# Altium PCB MIC29302 (2).PcbDoc
Units mm, origin at the board's own origin, x right, y up, seen from the top; angles counter-clockwise.
Board outline 152.4 x 101.6 mm, 2 copper layers (Top Layer, Bottom Layer), stack 0.325 mm thick; 78 components, 35 nets, 306 pads, 37 vias.
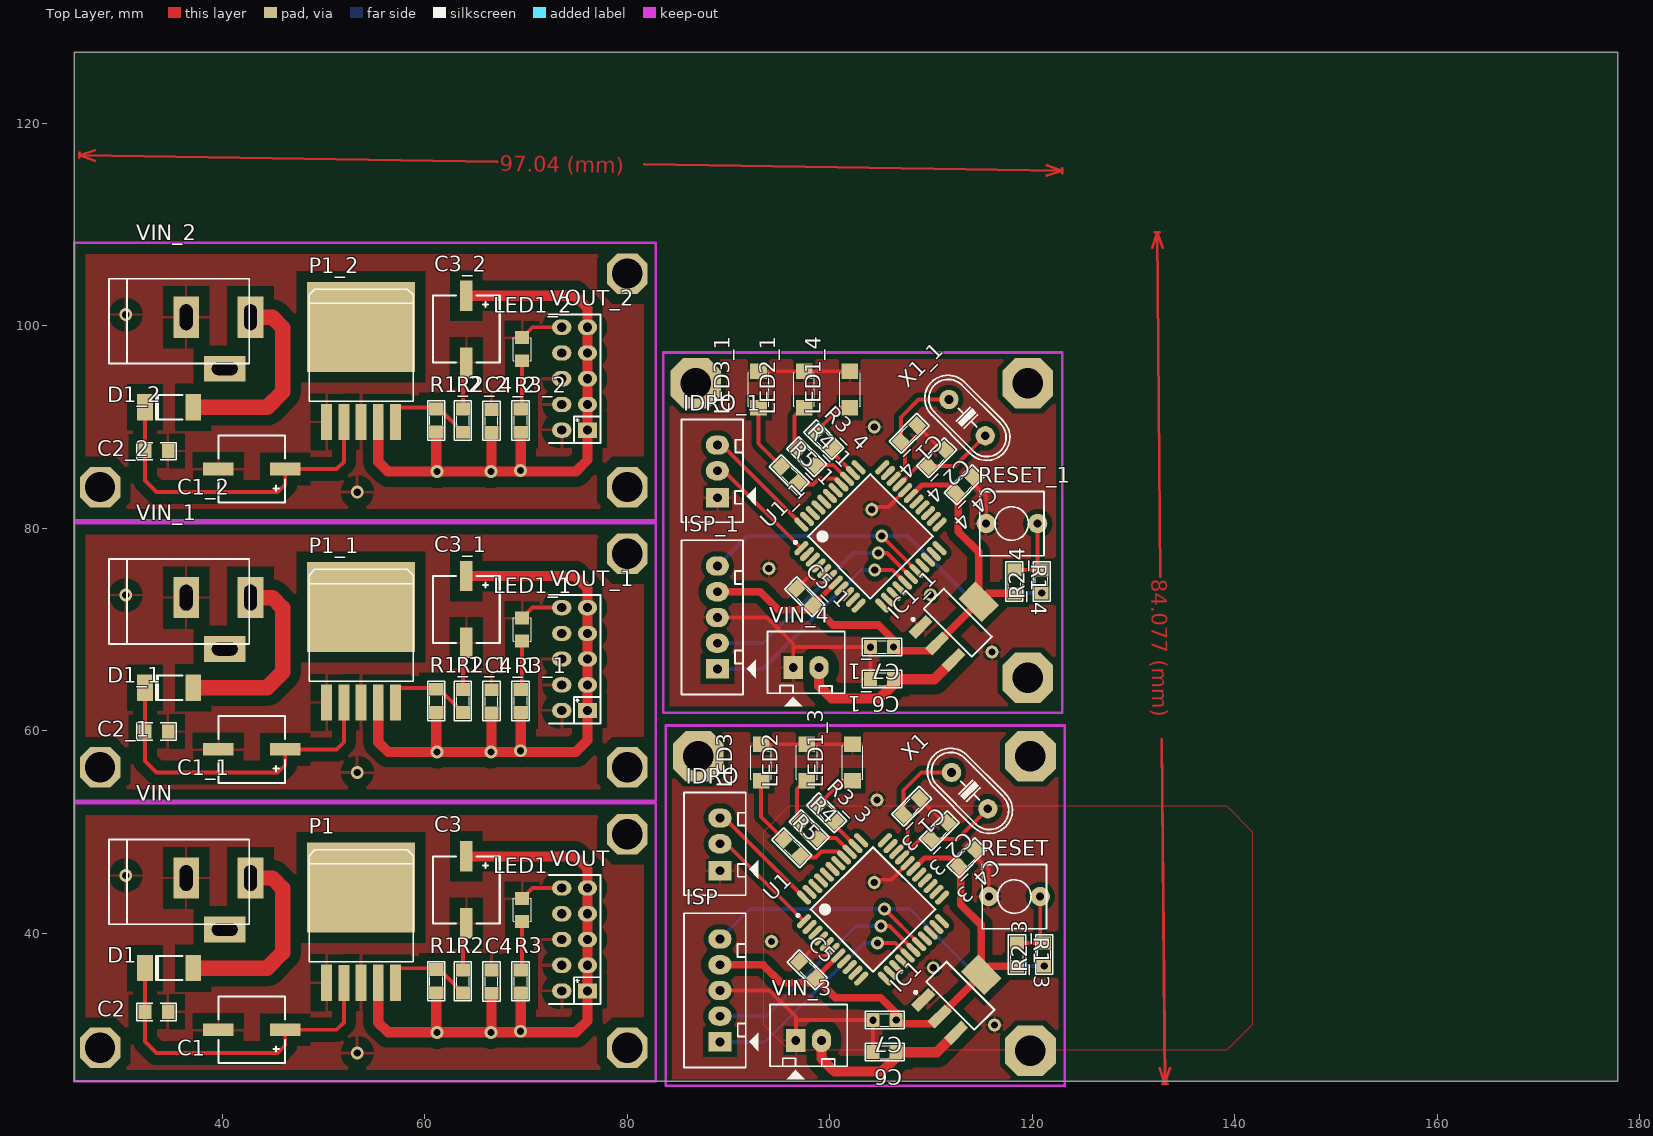
[diagram p0: Top Layer view]
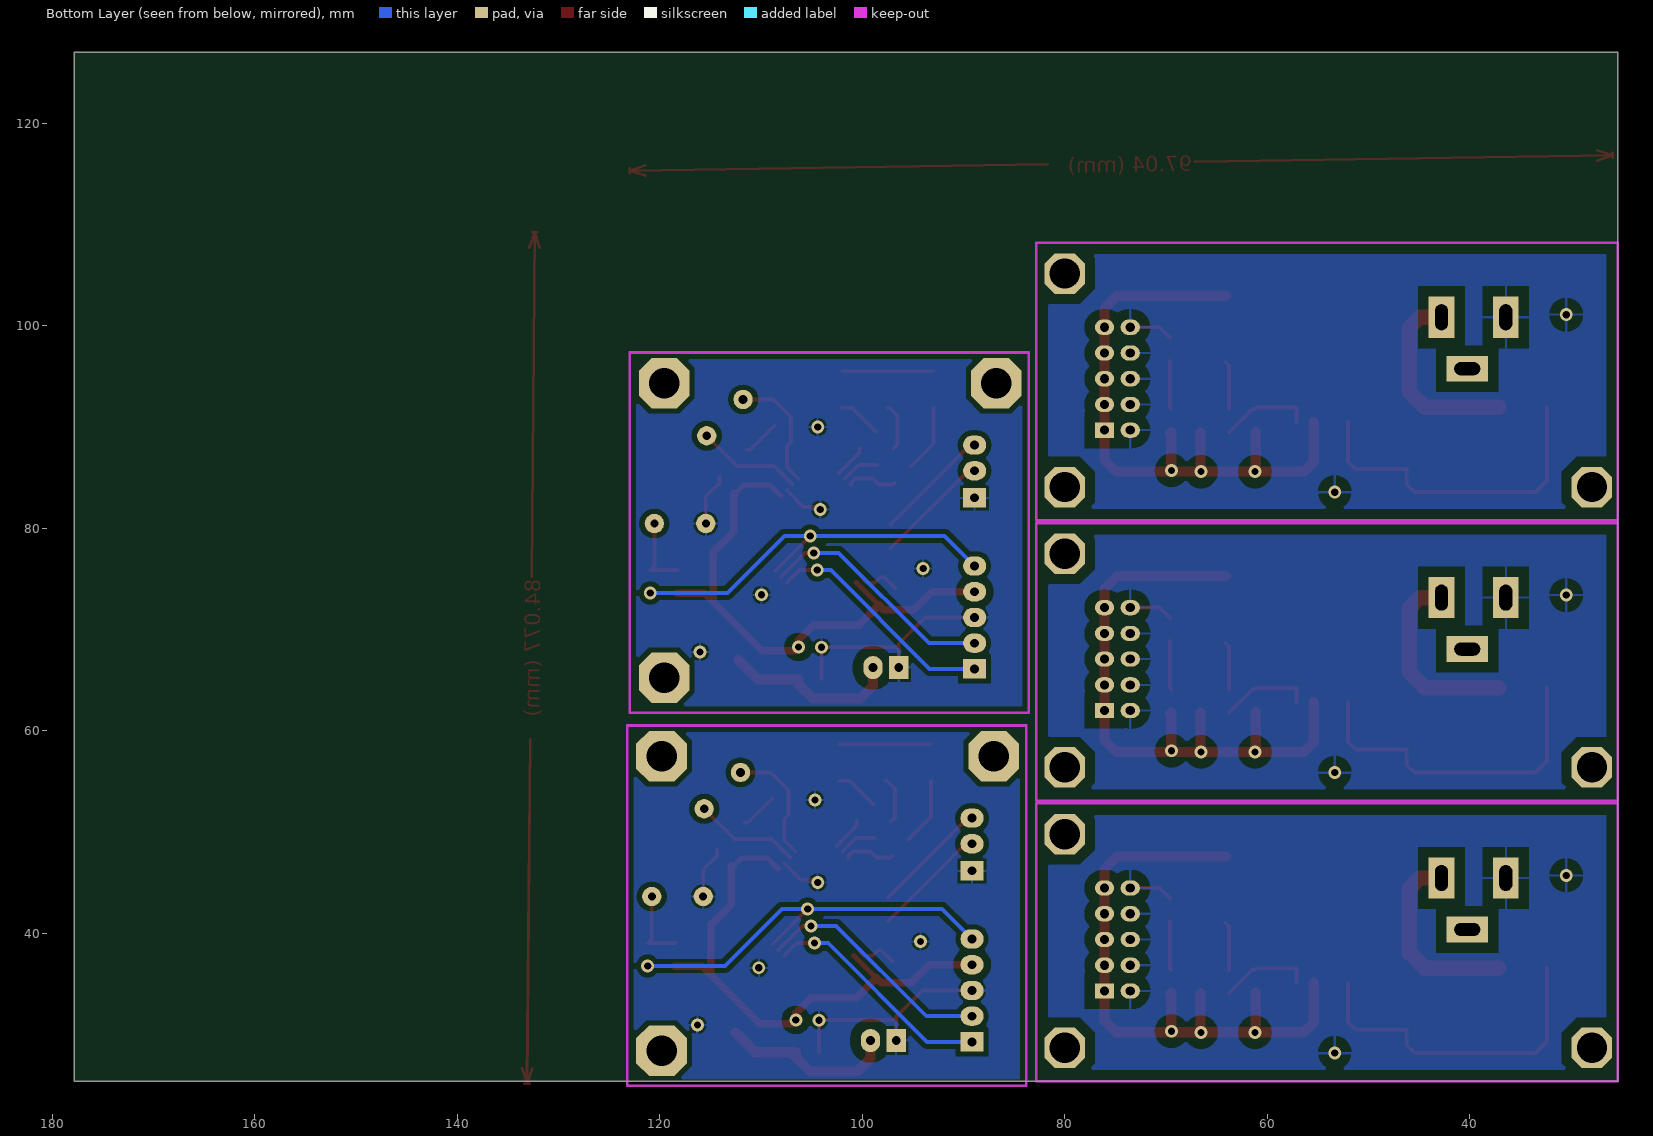
[diagram p1: Bottom Layer view, seen from below]
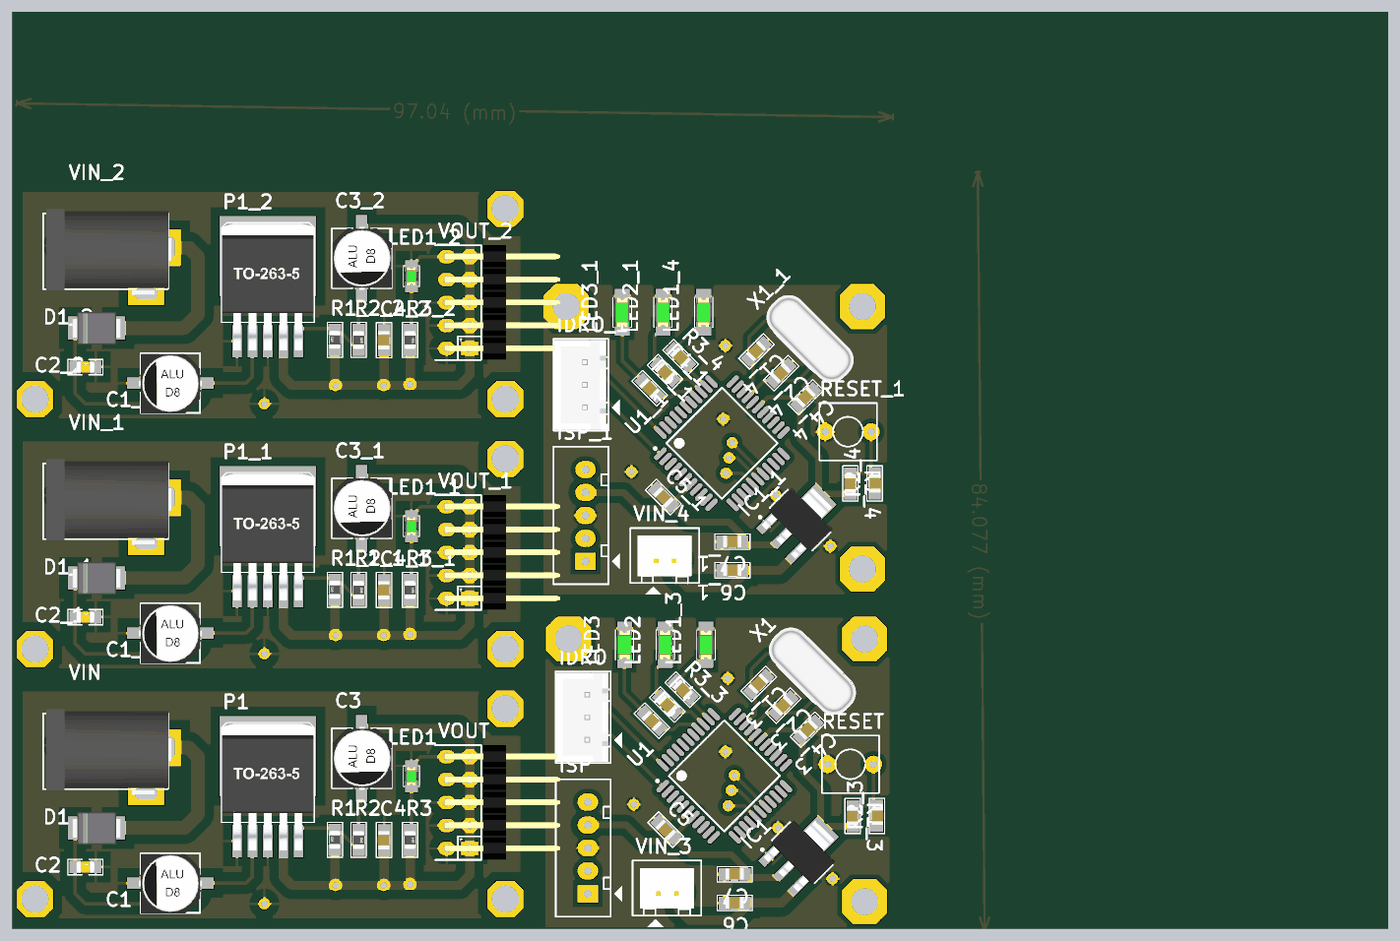
[diagram p2: 3D render of the assembled board from above, using the file's embedded part models]

## Layer stack, top to bottom
Top Layer: signal copper 0.0356
Dielectric: core 0.254, FR-4, Dk 4.2
Bottom Layer: signal copper 0.0356

## Board outline
25.4,25.4 177.8,25.4 177.8,127 25.4,127

## Design rules (kind name [scope] priority, off if disabled: settings)
Clearance CIN [All] p1: gap=1.016
Clearance COUT [InNet('OUT')] p2: gap=0.762
Clearance [All] p3: gap=0.508
PolygonConnect [All] p1: connectstyle=Relief reliefconductorwidth=0.254 reliefentries=4 polygonreliefangle="90 Angle"
RoutingVias [All] p1: holewidth=0.711 width=1.27 viastyle="Through Hole" minholewidth=0.711 minwidth=1.27 maxholewidth=0.711 maxwidth=1.27
SilkscreenOverComponentPads SilkToSolderMaskClearance [IsPad] p1: minsilkscreentomaskgap=0.254
SolderMaskExpansion [All] p1: expansion=0.102
Width OUT [InNet('OUT')] p1: maxlimit=1.016 minlimit=1.016 preferedwidth=1.016
Width IN [InNet('IN')] p2: maxlimit=1.524 minlimit=1.524 preferedwidth=1.524
Width [All] p3: maxlimit=0.381 minlimit=0.381 preferedwidth=0.381
27 further rules are at their usual default settings.

## Components (designator, comment, footprint, x,y, rotation, side; value= is the part's Value field where it differs from the comment)
C1 "100uF/450V" CAP-D8-220uF/16V 42.926,30.48 r180 top
C1_1 "100uF/450V" CAP-D8-220uF/16V 42.926,58.166 r180 top (schematic designator C1)
C1_2 "100uF/450V" CAP-D8-220uF/16V 42.926,85.852 r180 top (schematic designator C1)
C1_3 "22pF" SM-0805 108.077,52.527 r225 top (schematic designator C1)
C1_4 "22pF" SM-0805 107.823,89.357 r225 top (schematic designator C1)
C2 "1uF/450V" CAP0805 33.528,32.258 r0 top
C2_1 "1uF/450V" CAP0805 33.528,59.944 r0 top (schematic designator C2)
C2_2 "1uF/450V" CAP0805 33.528,87.63 r0 top (schematic designator C2)
C2_3 "2pF" SM-0805 110.807,50.114 r225 top (schematic designator C2)
C2_4 "2pF" SM-0805 110.553,86.944 r225 top (schematic designator C2)
C3 "220uF/450V" CAP-D8-220uF/16V 64.11,44.298 r270 top
C3_1 "220uF/450V" CAP-D8-220uF/16V 64.11,71.984 r270 top (schematic designator C3)
C3_2 "220uF/450V" CAP-D8-220uF/16V 64.11,99.67 r270 top (schematic designator C3)
C4 "103" SM-0805 66.599,35.23 r270 top
C4_1 "103" SM-0805 66.599,62.916 r270 top (schematic designator C4)
C4_2 "103" SM-0805 66.599,90.602 r270 top (schematic designator C4)
C4_3 "103" SM-0805 113.538,47.447 r225 top (schematic designator C4)
C4_4 "103" SM-0805 113.284,84.277 r225 top (schematic designator C4)
C5 "103" SM-0805 97.79,36.398 r315 top
C5_1 "103" SM-0805 97.536,73.228 r315 top (schematic designator C5)
C6 "1uF/450V" SM-0805 105.41,28.27 r180 top
C6_1 "1uF/450V" SM-0805 105.156,65.1 r180 top (schematic designator C6)
C7 "1uF/450V" SM-0805 105.41,31.445 r180 top
C7_1 "1uF/450V" SM-0805 105.156,68.275 r180 top (schematic designator C7)
D1 "1N5822" DIODE-M7 34.76,36.576 r180 top
D1_1 "1N5822" DIODE-M7 34.76,64.262 r180 top (schematic designator D1)
D1_2 "1N5822" DIODE-M7 34.76,91.948 r180 top (schematic designator D1)
IC1 "LM1117" SOT223-4N 112.903,33.858 r45 top
IC1_1 "LM1117" SOT223-4N 112.649,70.688 r45 top (schematic designator IC1)
IDRO "JP3" CON3 89.154,46.304 r90 top
IDRO_1 "JP3" CON3 88.9,83.134 r90 top (schematic designator IDRO)
ISP "JP5" CON5 89.154,29.286 r90 top
ISP_1 "JP5" CON5 88.9,66.116 r90 top (schematic designator ISP)
LED1 "LED" LED0805-Green 69.621,41.173 r90 top
LED1_1 "LED" LED0805-Green 69.621,68.859 r90 top (schematic designator LED1)
LED1_2 "LED" LED0805-Green 69.621,96.545 r90 top (schematic designator LED1)
LED1_3 "LED" LED1206-Green 102.235,55.067 r90 top (schematic designator LED1)
LED1_4 "LED" LED1206-Green 101.981,91.897 r90 top (schematic designator LED1)
LED2 "LED" LED1206-Green 97.727,55.067 r90 top
LED2_1 "LED" LED1206-Green 97.472,91.897 r90 top (schematic designator LED2)
LED3 "LED" LED1206-Green 93.218,55.067 r90 top
LED3_1 "LED" LED1206-Green 92.964,91.897 r90 top (schematic designator LED3)
P1 "MIC29302" LM2576_TO-263 53.721,42.723 r0 top
P1_1 "MIC29302" LM2576_TO-263 53.721,70.409 r0 top (schematic designator P1)
P1_2 "MIC29302" LM2576_TO-263 53.721,98.095 r0 top (schematic designator P1)
R1 "100k" RES0805 61.138,34.138 r90 top
R1_1 "100k" RES0805 61.138,61.824 r90 top (schematic designator R1)
R1_2 "100k" RES0805 61.138,89.51 r90 top (schematic designator R1)
R1_3 "4.7k" SM-0805 118.491,37.897 r270 top (schematic designator R1)
R1_4 "4.7k" SM-0805 118.237,74.727 r270 top (schematic designator R1)
R2 "43k" RES0805 63.779,36.398 r270 top
R2_1 "43k" RES0805 63.779,64.084 r270 top (schematic designator R2)
R2_2 "43k" RES0805 63.779,91.77 r270 top (schematic designator R2)
R2_3 "330" SM-0805 121.158,37.922 r90 top (schematic designator R2)
R2_4 "330" SM-0805 120.904,74.752 r90 top (schematic designator R2)
R3 "470" RES0805 69.482,36.398 r270 top
R3_1 "470" RES0805 69.482,64.084 r270 top (schematic designator R3)
R3_2 "470" RES0805 69.482,91.77 r270 top (schematic designator R3)
R3_3 "220" SM-0805 99.695,51.892 r315 top (schematic designator R3)
R3_4 "220" SM-0805 99.441,88.722 r315 top (schematic designator R3)
R4 "220" SM-0805 97.98,50.241 r315 top
R4_1 "220" SM-0805 97.727,87.071 r315 top (schematic designator R4)
R5 "220" SM-0805 96.266,48.463 r315 top
R5_1 "220" SM-0805 96.012,85.293 r315 top (schematic designator R5)
RESET "SW" SW2 115.697,43.637 r0 top
RESET_1 "SW" SW2 115.443,80.467 r0 top (schematic designator RESET)
U1 "PIC18F46K20-I/PT" TQFP-PT44_N 104.267,42.367 r45 top
U1_1 "PIC18F46K20-I/PT" TQFP-PT44_N 104.013,79.197 r45 top (schematic designator U1)
VIN "JP2" DC-IN 39.624,42.926 r0 top
VIN_1 "JP2" DC-IN 39.624,70.612 r0 top (schematic designator VIN)
VIN_2 "JP2" DC-IN 39.624,98.298 r0 top (schematic designator VIN)
VIN_3 "JP2" CON2 96.647,29.413 r0 top (schematic designator VIN)
VIN_4 "JP2" CON2 96.393,66.243 r0 top (schematic designator VIN)
VOUT "Header 5x2" HED2X5_cen 76.073,34.315 r90 top
VOUT_1 "Header 5x2" HED2X5_cen 76.073,62.001 r90 top (schematic designator VOUT)
VOUT_2 "Header 5x2" HED2X5_cen 76.073,89.687 r90 top (schematic designator VOUT)
X1 "4Mhz" XT2 113.811,54.097 r135 top
X1_1 "4Mhz" XT2 113.557,90.927 r135 top (schematic designator X1)

## Footprints (in the part's own frame and the unit in brackets; to place one, negate y for a bottom-side part, rotate by r counter-clockwise, add the part's x,y. Pads: shape width x height; smd on the part's side, far side on the other; paste and mask are expansions set on the pad)
CAP0805 [mil]
  rect 50x55 smd: 1(-45,0) 2(45,0)
  silkscreen extent -77,-34 76,33, body extent -39,-25 39,25, height 31
CAP-D8-220uF/16V [mm] "6.3 x 7.7 mm"
  rect 3x1.25 smd: 1(-3.302,0) 2(3.302,0)
  silkscreen extent -3.3,-3.3 3.3,3.3, body extent -3.5,-3.25 3.5,3.35, height 7.72
CON2 [mil] "CON2"
  rect 75x90 hole 34: 1(0,0)
  oval 75x90 hole 34: 2(100,0)
  silkscreen extent -100,-150 200,140, body extent -68,-70 168,107, height 236
CON3 [mil] "CON 3"
  rect 75x90 hole 34: 1(-5,0)
  oval 75x90 hole 34: 2(100,0) 3(200,0)
  silkscreen extent -100,-150 300,140, body extent -95,-90 295,136, height 276
CON5 [mil] "CON5"
  rect 75x90 hole 34: 1(0,0)
  oval 75x90 hole 34: 2(100,0) 3(200,0) 4(300,0) 5(400,0)
  silkscreen extent -100,-150 500,140
DC-IN [mil] "Jac DC input"
  rect 100x160 hole 50 slot 100 at 90 deg: 1(125,100) 2(-125,100)
  rect 160x100 hole 50 slot 100 at 0 deg: 3(25,-100)
  silkscreen extent -425,-80 120,250, body extent -410,-105 134,269, height 434
DIODE-M7 [mm] "Metal Electrode Face (MELF) Diode; Body 3.5 x 1.5 mm (LxDia)"
  rect 1.55x2.6 smd: 1(-2.375,0) 2(2.375,0)
  silkscreen extent -1.3,-1.2 1.3,1.2, body extent -2.7,-1.77 2.7,1.83, height 2.32
HED2X5_cen [mm] "Connector; Header; 5x2 Position"
  rect 1.5x1.9 hole 0.9: 1(0,0)
  oval 1.5x1.9 hole 0.9: 2(2.54,0) 3(5.08,0) 4(7.62,0) 5(10.16,0) 6(0,2.54) 7(2.54,2.54) 8(5.08,2.54) 9(7.62,2.54) 10(10.16,2.54)
  silkscreen extent -1.27,-1.27 11.43,3.81, body extent -1.24,-10.02 11.46,2.86, height 5.02
LED0805-Green [mil]
  rect 50x55 smd: 1(0,0) 2(90,0)
  silkscreen extent 0,-35 90,35, body extent 5,-25 85,25, height 43
LED1206-Green [mil]
  rect 60x65 smd: 1(0,0) 2(142,0)
  silkscreen extent 6,-40 136,40, body extent 7,-31 133,32, height 43
LM2576_TO-263 [mil]
  rect 420x350 smd: 0(0,70.87)
  rect 42x140 smd: 1(-134,-299.13) 2(-67,-299.21) 3(0,-299.13) 4(67,-299.13) 5(134,-299.13)
  silkscreen extent -203,-218 203,218, body extent -200,-339 200,213, height 180
RES0805 [mil]
  rect 50x55 smd: 1(0,0) 2(90,0)
  silkscreen extent -32,-34 121,33, body extent 6,-25 84,25, height 31
SM-0805 [mil] "Compoment SMD 80x50mil"
  rect 50x55 smd: 1(-45,0) 2(45,0)
  silkscreen extent -77,-34 76,33, body extent -40,-27 40,23, height 24
SOT223-4N [mm] "SOT223, 4-Leads, Body 6.5x3.5mm, Pitch 2.3mm, Lead Span 7mm, IPC Medium Density"
  rect 2.4x1 smd: 1(-2.9,2.3) 2(-2.9,0) 3(-2.9,-2.3)
  rect 2.4x3.3 smd: 4(2.9,0)
  silkscreen extent -3.02,-3.35 1.4,3.47, body extent -3.39,-3.27 3.5,3.23, height 1.72
SW2 [mil] "SW button 2pin, 250x 250 mil"
  round 75 hole 31: 1(0,0) 2(200,0)
  silkscreen extent -25,-125 225,125
TQFP-PT44_N [mm] "Thin QFP, 44-Leads, Body 10x10mm, Pitch 0.8mm, IPC Medium Density"
  oval 1.75x0.55 smd: 1(-5.65,4) 2(-5.65,3.2) 3(-5.65,2.4) 4(-5.65,1.6) 5(-5.65,0.8) 6(-5.65,0) 7(-5.65,-0.8) 8(-5.65,-1.6) 9(-5.65,-2.4) 10(-5.65,-3.2) 11(-5.65,-4) 23(5.65,-4) 24(5.65,-3.2) 25(5.65,-2.4) 26(5.65,-1.6) 27(5.65,-0.8) 28(5.65,0) 29(5.65,0.8) 30(5.65,1.6) 31(5.65,2.4) 32(5.65,3.2) 33(5.65,4)
  oval 0.55x1.75 smd: 12(-4,-5.65) 13(-3.2,-5.65) 14(-2.4,-5.65) 15(-1.6,-5.65) 16(-0.8,-5.65) 17(0,-5.65) 18(0.8,-5.65) 19(1.6,-5.65) 20(2.4,-5.65) 21(3.2,-5.65) 22(4,-5.65) 34(4,5.65) 35(3.2,5.65) 36(2.4,5.65) 37(1.6,5.65) 38(0.8,5.65) 39(0,5.65) 40(-0.8,5.65) 41(-1.6,5.65) 42(-2.4,5.65) 43(-3.2,5.65) 44(-4,5.65)
  silkscreen extent -5.77,-4.35 4.35,4.95, body extent -5,-5 5,5, height 1.2
XT2 [mil] "Footpin for Crystal 2 pin"
  round 75 hole 34: 1(-100,0) 2(100,0)
  silkscreen extent -198,-90 195,90, body extent -233,-93 213,90, height 138

## Part data
C1 C1_1 C1_2 C2 C2_1 C2_2 C3 C3_1 C3_2: library part CP9, "Cap 10000uF/63V"
C1_3 C1_4 C2_3 C2_4 C4 C4_1 C4_2 C4_3 C4_4 C5 C5_1: library part CM, "Cap SMD"
C6 C6_1 C7 C7_1: library part CP8, "Cap 4700uF/50V"
D1 D1_1 D1_2: library part D5A, "Diode 5A"
IC1 IC1_1: "3v3"
IDRO IDRO_1: library part Con3, "Connector 3"
ISP ISP_1: library part Con5, "Connector 5"
LED1 LED1_1 LED1_2 LED1_3 LED1_4 LED2 LED2_1 LED3 LED3_1: "LED Single colour Green and Red"
P1 P1_1 P1_2: library part LM2576
R1 R1_1 R1_2 R1_3 R1_4 R2 R2_1 R2_2 R2_3 R2_4 R3 R3_1 R3_2 R3_3 R3_4 R4 R4_1 R5 R5_1: library part R, "Resistor 1/4W"
RESET RESET_1: library part SW2, "Switch button 2 pin"
U1 U1_1: "Flash Microcontroller with 10-Bit A/D and nanoWatt Technology, 32K Flash, 44-Pin TQFP, Industrial Temperature Range"
VIN VIN_1 VIN_2 VIN_3 VIN_4: library part Con2, "Connector 2"
VOUT VOUT_1 VOUT_2: library part HED5x2
X1 X1_1: library part XT2, "Crystal For all Crystal 2pin."

## Free pads (board coordinates)
  oct 5x5 hole 3: 0(86.766,94.336) 0(87.02,57.506) 0(119.558,65.253) 0(119.558,94.336) 0(119.812,28.423) 0(119.812,57.506)
  oct 4x4 hole 3: 3(27.94,28.702) 3(27.94,56.388) 3(27.94,84.074) 3(80.01,28.702) 3(80.01,49.784) 3(80.01,56.388) 3(80.01,77.47) 3(80.01,84.074) 3(80.01,105.156)

## Via types
v1: diameter 1.27, hole 0.711, Top Layer to Bottom Layer, 37 vias

## Nets (pads, with @x,y where several pads share a name; then routed paths per layer and width w, separated by ;. In a path a pad name is that pad's centre, name@x,y a point inside that pad or via, vN(x,y) a via of type N, cw(c..) or ccw(c..) an arc to the next point about the centre after c; other vN are vias at no path point)
3.3V: 
12VDC: 
24/NEXT/DIR/: 
D4: 
D5: 
D6: 
D7: 
DC+: 
DC-: 
DIR: 
DOWN: 
EN: 
ENCODERA: 
ENCODERB: 
GND: C1.2 C2.2 C3.2 C4.1 LED1.2 P1.1 P1.3 R2.1 VIN.2 VOUT.6 VOUT.7 VOUT.8 VOUT.9 VOUT.10 | length 9.1
  Top Layer w0.381: R2.1 63.779,40.665 C3.2 ; LED1.2 70.637,44.475 VOUT.10
  other v1: 53.34,28.194 30.48,45.72
IN: D1.1 VIN.1 | length 19.4
  Top Layer w1.524: D1.1 44.45,36.576 45.974,38.1 45.974,44.45 44.958,45.466 VIN.1
MODE: 
NetC1_1: C1.1 C2.1 D1.2 P1.2 | length 33.4
  Top Layer w0.381: D1.2 C2.1 32.385,29.337 33.528,28.194 45.466,28.194 46.228,28.956 C1.1 51.308,30.48 52.019,31.191 P1.2
NetIC3_7: 
NetJDC1_1: 
NetLED1_1: LED1.1 R3.1 | length 4.8
  Top Layer w0.381: R3.1 69.621,36.538 LED1.1
NetLED1_2: 
NetLED2_2: 
NetP1_5: P1.5 R1.2 R2.2 | length 9.1
  Top Layer w0.381: P1.5 57.125,36.551 61.011,36.551 R1.2 61.468,36.424 R2.2
OUT: C3.1 C4.2 P1.4 R1.1 R3.2 VOUT.1 VOUT.2 VOUT.3 VOUT.4 VOUT.5 | length 64.9
  Top Layer w1.016: P1.4 55.423,31.191 56.388,30.226 v1(61.214,30.226) ; R1.1 61.138,30.302 v1(61.214,30.226) ; C3.1 74.828,47.6 76.073,46.355 VOUT.5 VOUT.4 VOUT.3 VOUT.2 VOUT.1 76.073,31.369 74.93,30.226 v1@69.342,30.226 ; C4.2 66.599,30.277 v1(66.548,30.226) ; R3.2@69.596,33.998 R3.2 69.482,30.34 v1(69.456,30.34) v1@69.342,30.226 ; v1(61.214,30.226) v1(66.548,30.226) ; v1(66.548,30.226) v1@69.342,30.226
PWM: 
RS: 
RST: 
SCL: 
SDA: 
SET: 
TEST: 
UP: 
V0: 
VCC: 
pads on no net: C1_1.1 C1_1.2 C1_2.1 C1_2.2 C1_3.1 C1_3.2 C1_4.1 C1_4.2 C2_1.1 C2_1.2 C2_2.1 C2_2.2 C2_3.1 C2_3.2 C2_4.1 C2_4.2 C3_1.1 C3_1.2 C3_2.1 C3_2.2 C4_1.1 C4_1.2 C4_2.1 C4_2.2 C4_3.1 C4_3.2 C4_4.1 C4_4.2 C5.1 C5.2 C5_1.1 C5_1.2 C6.1 C6.2 C6_1.1 C6_1.2 C7.1 C7.2 C7_1.1 C7_1.2 D1_1.1 D1_1.2 D1_2.1 D1_2.2 IC1.1 IC1.2 IC1.3 IC1.4 IC1_1.1 IC1_1.2 IC1_1.3 IC1_1.4 IDRO.1 IDRO.2 IDRO.3 IDRO_1.1 IDRO_1.2 IDRO_1.3 ISP.1 ISP.2 ISP.3 ISP.4 ISP.5 ISP_1.1 ISP_1.2 ISP_1.3 ISP_1.4 ISP_1.5 LED1_1.1 LED1_1.2 LED1_2.1 LED1_2.2 LED1_3.1 LED1_3.2 LED1_4.1 LED1_4.2 LED2.1 LED2.2 LED2_1.1 LED2_1.2 LED3.1 LED3.2 LED3_1.1 LED3_1.2 P1.0 P1_1.0 P1_1.1 P1_1.2 P1_1.3 P1_1.4 P1_1.5 P1_2.0 P1_2.1 P1_2.2 P1_2.3 P1_2.4 P1_2.5 R1_1.1 R1_1.2 R1_2.1 R1_2.2 R1_3.1 R1_3.2 R1_4.1 R1_4.2 R2_1.1 R2_1.2 R2_2.1 R2_2.2 R2_3.1 R2_3.2 R2_4.1 R2_4.2 R3_1.1 R3_1.2 R3_2.1 R3_2.2 R3_3.1 R3_3.2 R3_4.1 R3_4.2 R4.1 R4.2 R4_1.1 R4_1.2 R5.1 R5.2 R5_1.1 R5_1.2 RESET.1 RESET.2 RESET_1.1 RESET_1.2 U1.1 U1.2 U1.3 U1.4 U1.5 U1.6 U1.7 U1.8 U1.9 U1.10 U1.11 U1.12 U1.13 U1.14 U1.15 U1.16 U1.17 U1.18 U1.19 U1.20 U1.21 U1.22 U1.23 U1.24 U1.25 U1.26 U1.27 U1.28 U1.29 U1.30 U1.31 U1.32 U1.33 U1.34 U1.35 U1.36 U1.37 U1.38 U1.39 U1.40 U1.41 U1.42 U1.43 U1.44 U1_1.1 U1_1.2 U1_1.3 U1_1.4 U1_1.5 U1_1.6 U1_1.7 U1_1.8 U1_1.9 U1_1.10 U1_1.11 U1_1.12 U1_1.13 U1_1.14 U1_1.15 U1_1.16 U1_1.17 U1_1.18 U1_1.19 U1_1.20 U1_1.21 U1_1.22 U1_1.23 U1_1.24 U1_1.25 U1_1.26 U1_1.27 U1_1.28 U1_1.29 U1_1.30 U1_1.31 U1_1.32 U1_1.33 U1_1.34 U1_1.35 U1_1.36 U1_1.37 U1_1.38 U1_1.39 U1_1.40 U1_1.41 U1_1.42 U1_1.43 U1_1.44 VIN.3 VIN_1.1 VIN_1.2 VIN_1.3 VIN_2.1 VIN_2.2 VIN_2.3 VIN_3.1 VIN_3.2 VIN_4.1 VIN_4.2 VOUT_1.1 VOUT_1.2 VOUT_1.3 VOUT_1.4 VOUT_1.5 VOUT_1.6 VOUT_1.7 VOUT_1.8 VOUT_1.9 VOUT_1.10 VOUT_2.1 VOUT_2.2 VOUT_2.3 VOUT_2.4 VOUT_2.5 VOUT_2.6 VOUT_2.7 VOUT_2.8 VOUT_2.9 VOUT_2.10 X1.1 X1.2 X1_1.1 X1_1.2
copper on no net: | length 1025.7
  Top Layer w0.254: 25.904,116.586 25.912,117.094 ; 27.424,116.308 25.908,116.84 ; 27.44,117.324 25.908,116.84 ; 67.161,116.192 25.908,116.84 ; 81.683,115.964 122.936,115.316 ; 121.404,114.832 122.936,115.316 ; 121.42,115.848 122.936,115.316 ; 122.932,115.062 122.94,115.57 ; 131.84,107.691 132.334,109.22 ; 132.08,109.218 132.588,109.222 ; 132.574,26.665 133.096,25.146 ; 132.642,75.207 132.334,109.22 ; 132.788,59.159 133.096,25.146 ; 132.842,25.144 133.35,25.148 ; 132.856,107.701 132.334,109.22 ; 133.59,26.675 133.096,25.146
  Top Layer w0.381: 32.385,64.262 32.385,59.944 32.385,57.023 33.528,55.88 45.466,55.88 46.228,56.642 46.228,58.166 51.308,58.166 52.019,58.877 52.019,62.809 ; 32.385,91.948 32.385,87.63 32.385,84.709 33.528,83.566 45.466,83.566 46.228,84.328 46.228,85.852 51.308,85.852 52.019,86.563 52.019,90.495 ; 57.125,62.811 57.125,64.237 61.011,64.237 61.138,64.11 61.468,64.11 63.779,61.798 ; 57.125,90.497 57.125,91.923 61.011,91.923 61.138,91.796 61.468,91.796 63.779,89.484 ; 63.779,64.084 63.779,68.351 64.11,68.682 ; 63.779,91.77 63.779,96.037 64.11,96.368 ; 69.482,64.084 69.621,64.224 69.621,68.859 ; 69.482,91.77 69.621,91.91 69.621,96.545 ; 69.621,71.145 70.637,72.161 73.533,72.161 ; 69.621,98.831 70.637,99.847 73.533,99.847 ; 88.9,71.196 93.796,71.196 96.393,68.599 96.393,68.275 ; 88.9,85.674 89.546,85.674 97.189,78.03 ; 88.9,88.214 89.339,88.214 97.189,80.364 ; 89.154,34.366 94.05,34.366 96.647,31.769 96.647,31.445 ; 89.154,48.844 89.8,48.844 97.443,41.2 ; 89.154,51.384 89.593,51.384 97.443,43.534 ; 92.964,91.897 92.964,88.341 95.204,86.101 ; 92.964,95.504 97.472,95.504 101.981,95.504 ; 93.218,55.067 93.218,51.511 95.458,49.271 ; 93.218,58.674 97.727,58.674 102.235,58.674 ; 96.393,66.243 96.393,68.275 ; 96.647,29.413 96.647,31.445 ; 96.728,74.036 97.861,75.17 98.184,75.17 98.73,74.624 99.554,74.624 99.904,74.974 99.904,75.202 100.018,75.202 ; 96.82,84.485 96.981,84.324 98.345,84.324 98.923,84.902 100.685,84.902 101.035,84.551 101.035,84.324 101.149,84.324 ; 96.918,87.879 96.52,88.278 96.52,91.11 97.307,91.897 97.472,91.897 ; 96.982,37.206 98.115,38.34 98.438,38.34 98.984,37.794 99.808,37.794 100.158,38.144 100.158,38.372 100.272,38.372 ; 97.074,47.655 97.235,47.494 98.599,47.494 99.177,48.072 100.939,48.072 101.289,47.721 101.289,47.494 101.403,47.494 ; 97.172,51.049 96.774,51.448 96.774,54.28 97.561,55.067 97.727,55.067 ; 98.535,86.263 100.341,86.263 101.715,84.889 ; 98.633,89.53 101,91.897 101.981,91.897 ; 98.789,49.433 100.595,49.433 101.969,48.059 ; 98.887,52.7 101.254,55.067 102.235,55.067 ; 100.249,87.914 100.249,87.486 102.281,85.455 ; 100.503,51.084 100.503,50.656 102.535,48.625 ; 104.013,65.1 104.013,68.275 96.393,68.275 ; v1(104.14,81.864) 104.394,82.118 105.803,82.118 107.442,83.758 ; 104.267,28.27 104.267,31.445 96.647,31.445 ; v1(104.394,45.034) 104.648,45.288 106.057,45.288 107.696,46.928 ; v1(104.445,75.87) 106.209,75.87 107.442,74.636 ; v1(104.699,39.04) 106.463,39.04 107.696,37.806 ; v1@104.877,77.241 104.648,77.47 104.648,77.572 v1(104.788,77.572) 105.639,77.572 108.008,75.202 ; v1@105.131,40.411 104.902,40.64 104.902,40.742 v1(105.042,40.742) 105.893,40.742 108.262,38.372 ; v1@105.131,79.211 v1(105.131,79.248) 108.574,75.805 108.574,75.768 ; v1@105.385,42.381 v1(105.385,42.418) 108.828,38.975 108.828,38.938 ; 106.311,84.889 107.442,86.02 107.442,88.122 107.015,88.549 107.015,90.962 108.776,92.723 111.761,92.723 ; 106.565,48.059 107.696,49.19 107.696,51.292 107.269,51.719 107.269,54.132 109.03,55.893 112.015,55.893 ; 106.877,84.324 108.689,86.136 109.745,86.136 112.358,86.136 115.353,89.131 ; 107.131,47.494 108.943,49.306 109.999,49.306 112.612,49.306 115.607,52.301 ; 108.631,90.165 111.044,87.752 111.362,87.752 ; 108.885,53.335 111.298,50.922 111.616,50.922 ; 114.092,85.085 114.092,84.485 115.443,83.134 115.443,80.467 ; 114.346,48.255 114.346,47.655 115.697,46.304 115.697,43.637 ; 118.237,75.87 120.879,75.87 120.904,75.895 120.523,76.276 120.523,80.467 ; 118.491,39.04 121.133,39.04 121.158,39.065 120.777,39.446 120.777,43.637
  Top Layer w0.508: 98.344,72.42 98.367,72.42 100.584,74.636 ; 98.598,35.59 98.621,35.59 100.838,37.806 ; 108.008,83.192 109.093,84.277 111.668,84.277 112.476,83.469 ; 108.262,46.362 109.347,47.447 111.922,47.447 112.73,46.639
  Top Layer w0.762: 88.9,73.736 93.142,73.736 94.928,71.95 97.875,71.95 98.344,72.42 100.305,70.46 104.779,70.46 106.299,68.939 v1(106.299,68.275) 106.655,67.919 109.88,67.919 110.598,68.638 114.7,72.739 ; 89.154,36.906 93.396,36.906 95.182,35.12 98.129,35.12 98.598,35.59 100.559,33.63 105.033,33.63 106.553,32.109 v1(106.553,31.445) 106.909,31.089 110.134,31.089 110.852,31.808 114.954,35.909 ; 112.476,83.469 112.679,83.469 112.679,79.675 114.7,77.655 114.7,72.739 ; 112.73,46.639 112.933,46.639 112.933,42.845 114.954,40.825 114.954,35.909 ; 118.237,73.584 115.545,73.584 114.7,72.739 ; 118.491,36.754 115.799,36.754 114.954,35.909
  Top Layer w1.016: 55.423,62.811 55.423,58.877 56.388,57.912 v1(61.214,57.912) ; 55.423,90.497 55.423,86.563 56.388,85.598 v1(61.214,85.598) ; 61.138,61.824 61.138,57.988 v1(61.214,57.912) ; 61.138,89.51 61.138,85.674 v1(61.214,85.598) ; 64.11,75.286 74.828,75.286 76.073,74.041 76.073,72.161 76.073,69.621 76.073,67.081 76.073,64.541 76.073,62.001 76.073,59.055 74.93,57.912 v1@69.342,57.912 ; 64.11,102.972 74.828,102.972 76.073,101.727 76.073,99.847 76.073,97.307 76.073,94.767 76.073,92.227 76.073,89.687 76.073,86.741 74.93,85.598 v1@69.342,85.598 ; 66.599,61.773 66.599,57.963 v1(66.548,57.912) ; 66.599,89.459 66.599,85.649 v1(66.548,85.598) ; 69.596,61.684 69.482,61.798 69.482,58.026 v1(69.456,58.026) v1@69.342,57.912 ; 69.596,89.37 69.482,89.484 69.482,85.712 v1(69.456,85.712) v1@69.342,85.598 ; 98.933,66.243 98.933,64.465 100.203,63.195 104.902,63.195 106.299,64.592 106.299,65.1 110.314,65.1 112.225,67.011 ; 99.187,29.413 99.187,27.635 100.457,26.365 105.156,26.365 106.553,27.762 106.553,28.27 110.568,28.27 112.479,30.181 ; v1(61.214,57.912) v1(66.548,57.912) ; v1(61.214,85.598) v1(66.548,85.598) ; v1(66.548,57.912) v1@69.342,57.912 ; v1(66.548,85.598) v1@69.342,85.598
  Top Layer w1.524: 37.135,64.262 44.45,64.262 45.974,65.786 45.974,72.136 44.958,73.152 42.799,73.152 ; 37.135,91.948 44.45,91.948 45.974,93.472 45.974,99.822 44.958,100.838 42.799,100.838
  Bottom Layer w0.381: 88.9,66.116 93.345,66.116 103.099,75.87 v1(104.445,75.87) ; 88.9,68.656 93.421,68.656 102.337,77.572 v1(104.788,77.572) ; 88.9,76.276 91.872,79.248 v1(105.131,79.248) 107.671,79.248 113.309,73.609 v1(120.929,73.609) ; 89.154,29.286 93.599,29.286 103.353,39.04 v1(104.699,39.04) ; 89.154,31.826 93.675,31.826 102.591,40.742 v1(105.042,40.742) ; 89.154,39.446 92.126,42.418 v1(105.385,42.418) 107.925,42.418 113.563,36.779 v1(121.183,36.779)
  other v1: 116.256,30.963 104.267,31.42 110.211,36.601 94.234,39.192 104.648,53.162 53.34,55.88 116.002,67.793 104.013,68.25 30.48,73.406 109.957,73.431 93.98,76.022 53.34,83.566 104.394,89.992 30.48,101.092

## Polygon pours and split planes (outlines as drawn)
no net on Top Layer "Top Layer-No Net" (solid, remove dead copper, pour order 24): 83.566,97.358 83.566,61.925 83.693,61.798 122.936,61.798 122.936,97.358
no net on Top Layer "Top Layer-No Net" (solid, remove dead copper, pour order 24): 83.82,60.528 83.82,25.095 83.947,24.968 123.19,24.968 123.19,60.528
no net on Top Layer "Top Layer-No Net" (solid, remove dead copper, pour order 15): 25.4,108.204 25.4,80.772 82.804,80.772 82.804,108.204
no net on Top Layer "Top Layer-No Net" (solid, remove dead copper, pour order 15): 25.4,80.518 25.4,53.086 82.804,53.086 82.804,80.518
GND on Top Layer "Top Layer-No Net" (solid, remove dead copper, pour order 15): 25.4,52.832 25.4,25.4 82.804,25.4 82.804,52.832
GND on Top Layer "Top Layer-No Net" (solid, remove dead copper, shelved, pour order 4): 96.012,52.578 139.192,52.578 141.732,50.038 141.732,30.988 139.192,28.448 96.012,28.448 93.472,30.988 93.472,50.038 96.012,52.578
no net on Bottom Layer "Top Layer-No Net" (solid, remove dead copper, pour order 22): 122.936,97.079 122.834,97.18 83.566,97.18 83.566,61.798 122.936,61.798
no net on Bottom Layer "Top Layer-No Net" (solid, remove dead copper, pour order 22): 123.19,60.249 123.088,60.35 83.82,60.35 83.82,24.968 123.19,24.968
no net on Bottom Layer "Top Layer-No Net" (solid, remove dead copper, pour order 17): 25.4,108.204 25.4,80.772 82.804,80.772 82.804,108.204
no net on Bottom Layer "Top Layer-No Net" (solid, remove dead copper, pour order 17): 25.4,80.518 25.4,53.086 82.804,53.086 82.804,80.518
GND on Bottom Layer "Top Layer-No Net" (solid, remove dead copper, pour order 17): 25.4,52.832 25.4,25.4 82.804,25.4 82.804,52.832

## Keep-outs
Keep-Out Layer:
  lines w0.254: 25.4,25.4 82.804,25.4 82.804,52.832 25.4,52.832 25.4,25.4 ; 25.4,53.086 25.4,80.518 82.804,80.518 82.804,53.086 25.4,53.086 ; 25.4,80.772 25.4,108.204 82.804,108.204 82.804,80.772 25.4,80.772 ; 83.566,61.798 83.566,97.358 122.936,97.358 122.936,61.798 83.566,61.798 ; 83.82,24.968 83.82,60.528 123.19,60.528 123.19,24.968 83.82,24.968

## Other copper
Top Layer:
  text "97.04 (mm)" at 67.4,115.274 h1.52 r359.1
  text "84.077 (mm)" at 131.73,74.944 h1.52 r270.52